# Altium PCB ATMEGA128转换座_方形.PCBDOC
Units mm, origin at the board's own origin, x right, y up, seen from the top; angles counter-clockwise.
Board outline 152.4 x 101.6 mm, 2 copper layers (Top Layer, Bottom Layer); 5 components, 61 nets, 128 pads, 0 vias.
Unrouted connection lines stored in the file: 3.
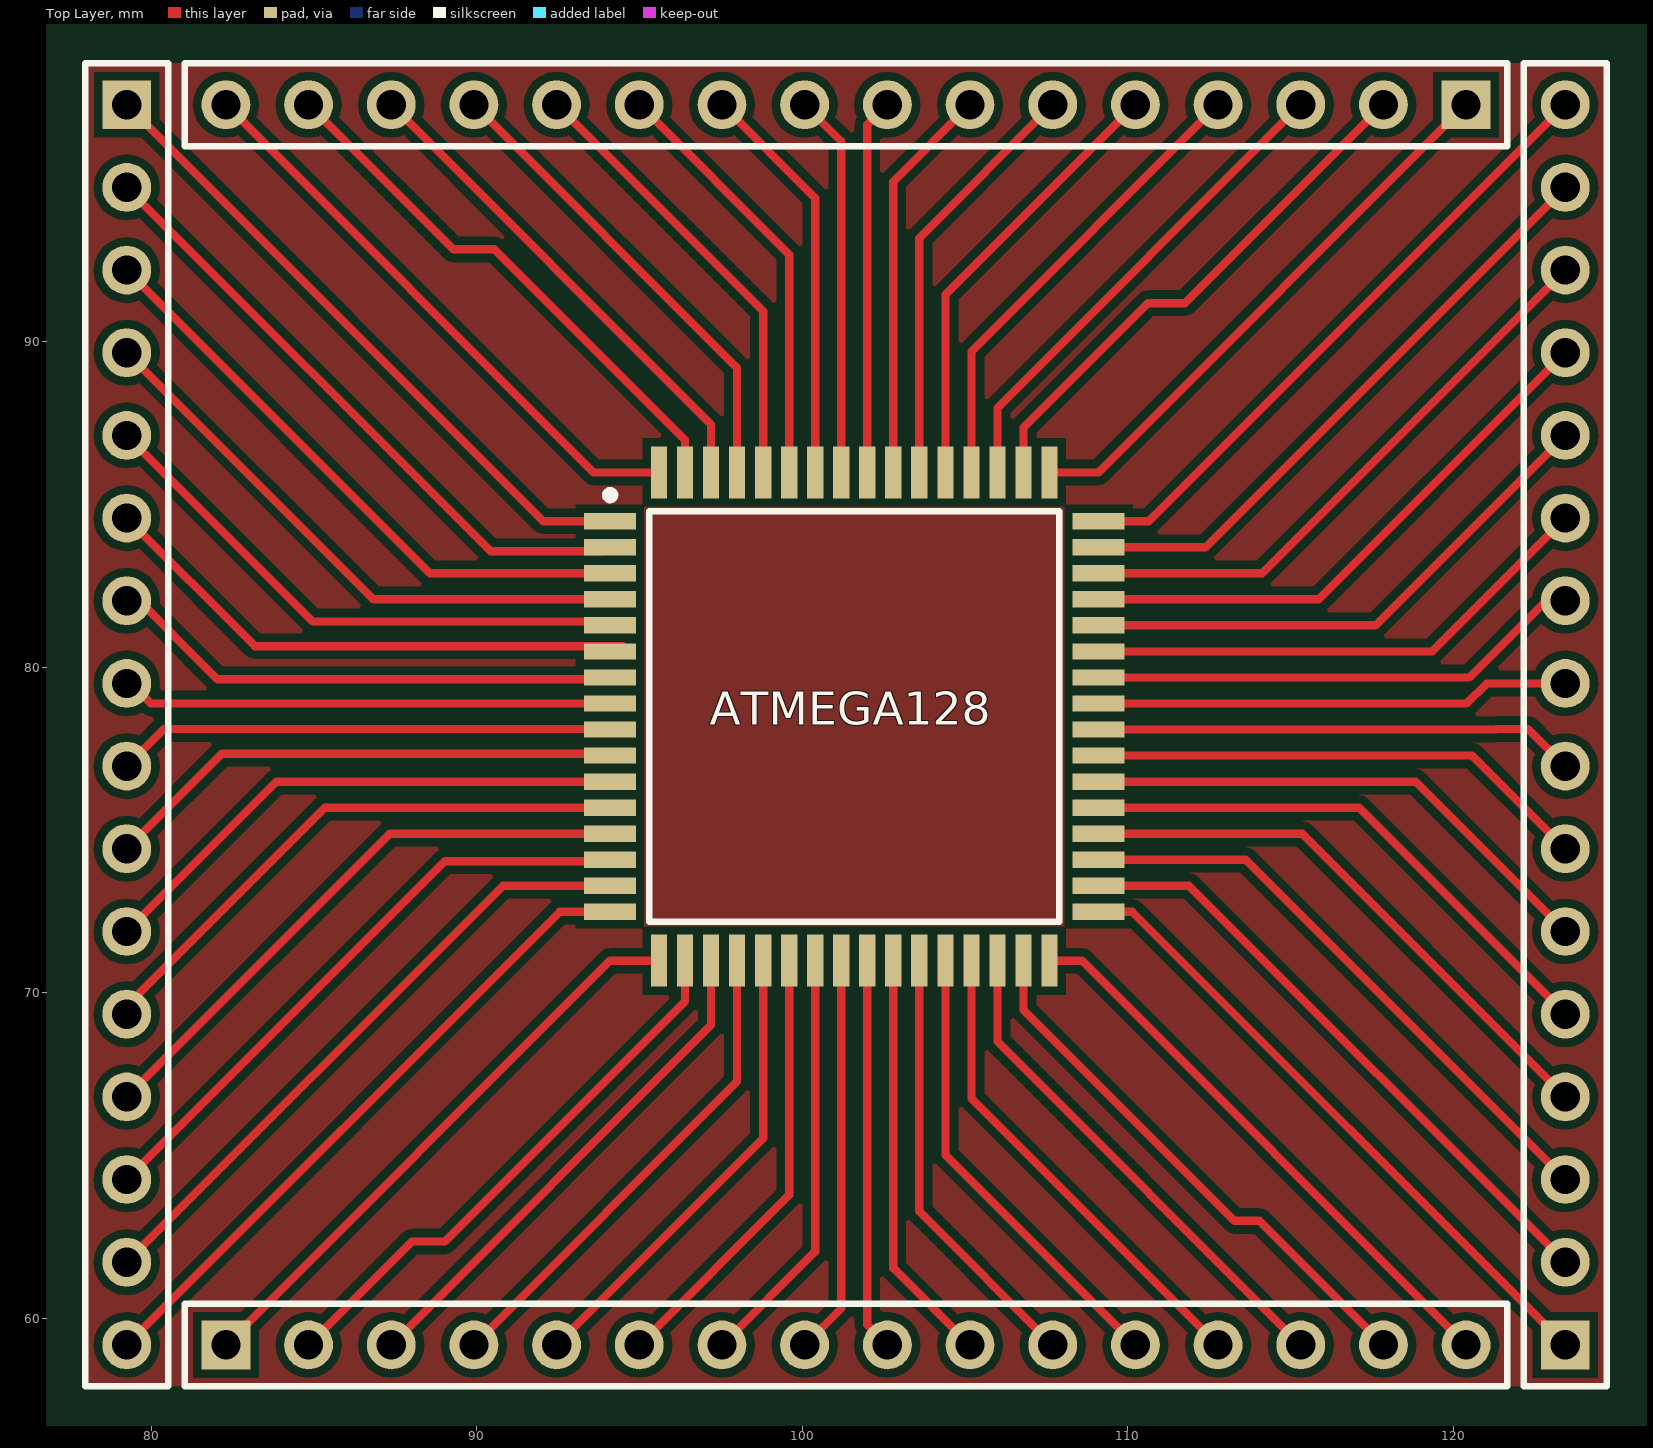
[diagram p0: Top Layer view]
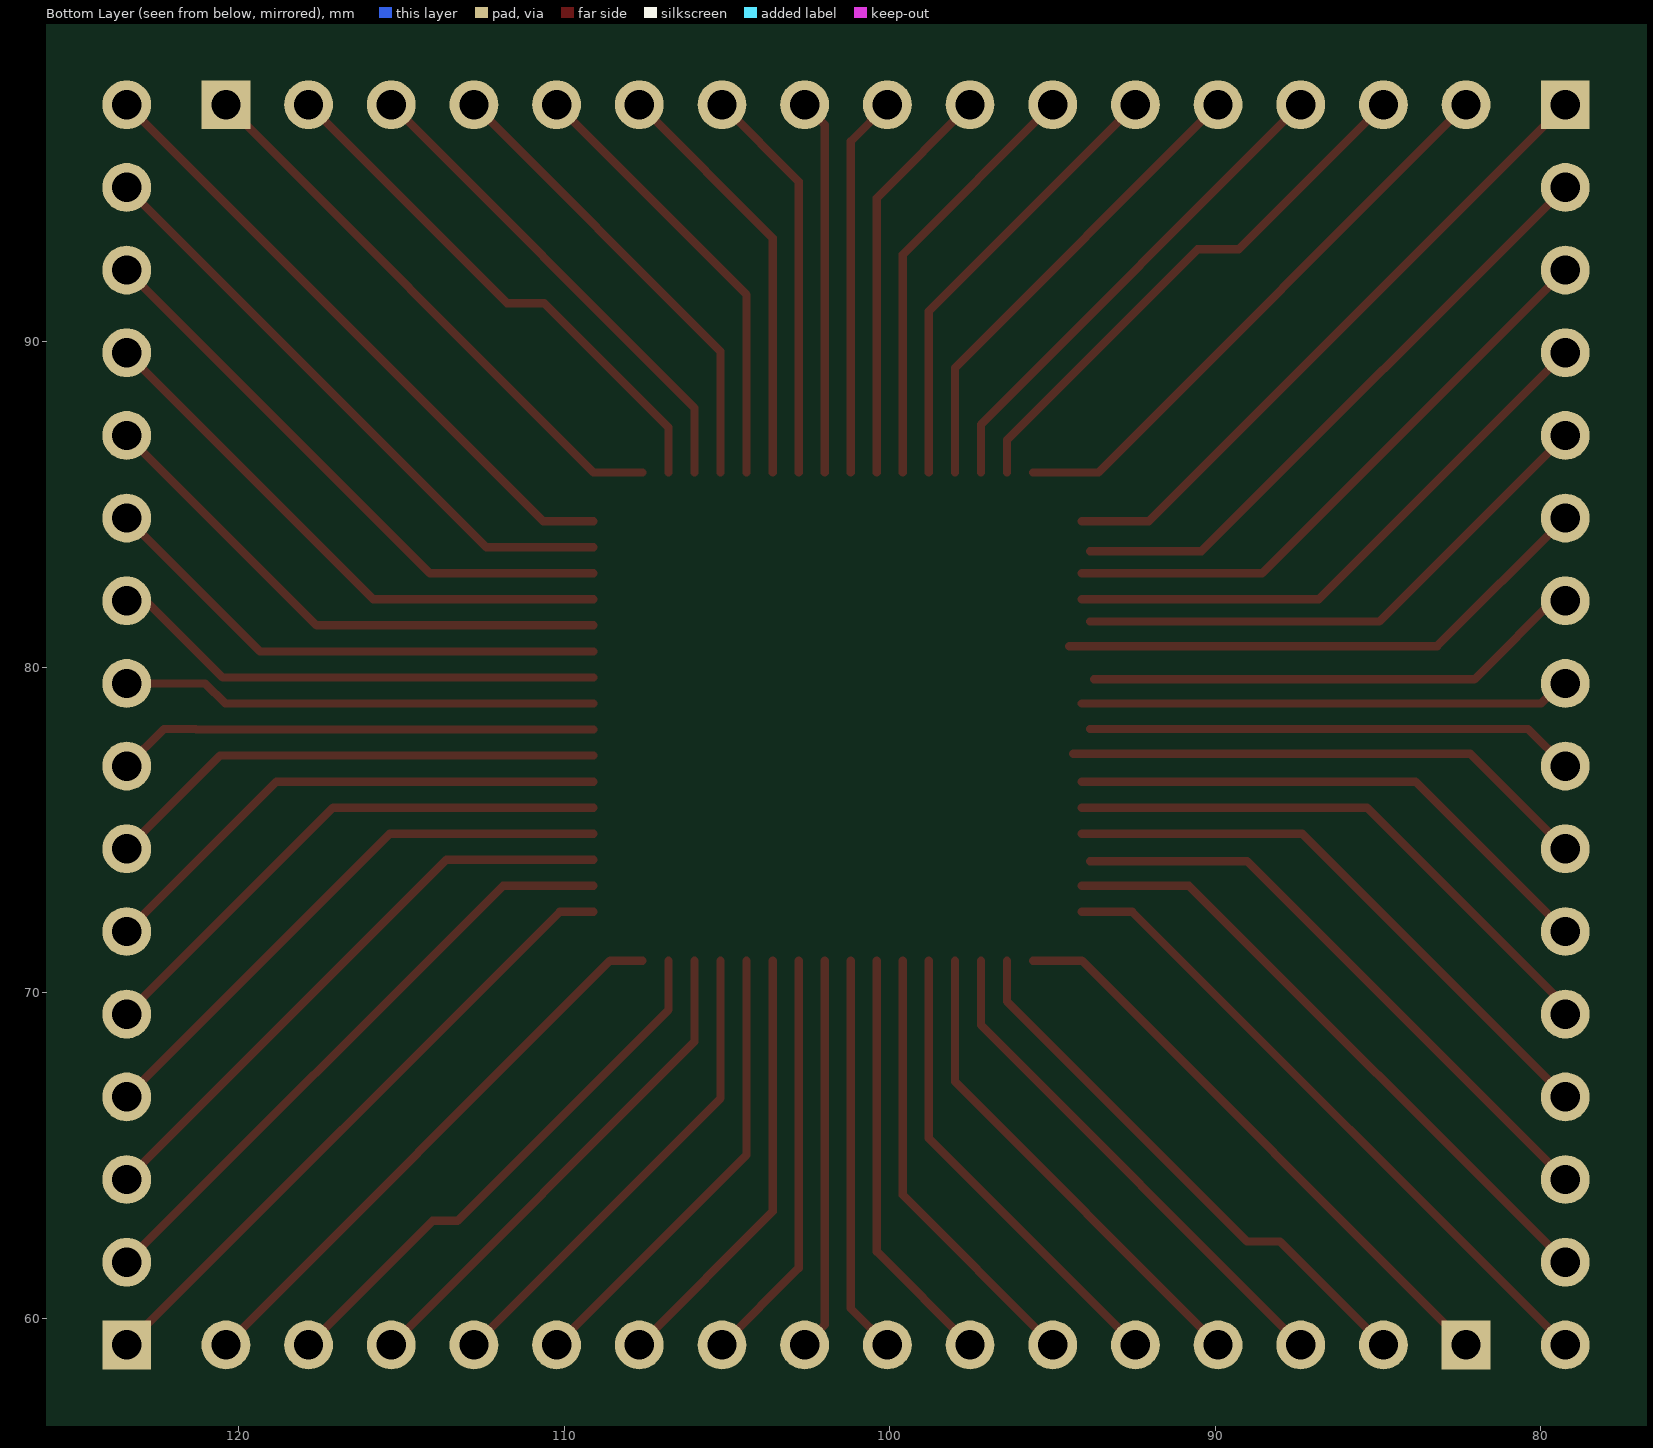
[diagram p1: Bottom Layer view, seen from below]

## Layer stack, top to bottom
Top Layer: signal copper 0.0356
Dielectric: dielectric 0.32, FR-4, Dk 4.8
Bottom Layer: signal copper 0.0356

## Board outline
25.4,25.4 177.8,25.4 177.8,127 25.4,127

## Design rules (kind name [scope] priority, off if disabled: settings)
Clearance [All] p1: gap=0.254
ComponentClearance [All] p1: gap=0.254 collisioncheckmode=3 verticalgap=0.254
PolygonConnect [All] p1: connectstyle=Relief reliefconductorwidth=0.254 reliefentries=4 polygonreliefangle="90 Angle"
RoutingVias [All] p1: holewidth=0.711 width=1.27 viastyle="Through Hole" minholewidth=0.711 minwidth=1.27 maxholewidth=0.711 maxwidth=1.27
SolderMaskExpansion [All] p1: expansion=0.102
TestPointUsage [All] p1: valid=0 allowmultiple=FALSE
Testpoint [All] p1: side=15 testpointundercomponent=TRUE minsize=1.016 maxsize=2.54 preferedsize=1.524 minholesize=0 maxholesize=1.016 preferedholesize=0.813 testpointgrid=0.025 style=1023 order=0123456789
Width [All] p1: maxlimit=0.254 minlimit=0.254 preferedwidth=0.254
17 further rules are at their usual default settings.

## Classes and differential pairs
component class ATMEGA128转换座: ATMEGA128 ""

## Components (designator, comment, footprint, x,y, rotation, side; value= is the part's Value field where it differs from the comment)
ATMEGA128 "ATmega128-16AI" 64A 101.6,78.486 r0 top (schematic designator U1)
P1 "Header 16" HDR1X16 79.248,97.282 r270 top
P2 "Header 16" HDR1X16 82.296,59.182 r0 top
P3 "Header 16" HDR1X16 123.444,59.182 r90 top
P4 "Header 16" HDR1X16 120.396,97.282 r180 top

## Footprints (in the part's own frame and the unit in brackets; to place one, negate y for a bottom-side part, rotate by r counter-clockwise, add the part's x,y. Pads: shape width x height; smd on the part's side, far side on the other; paste and mask are expansions set on the pad)
64A [mm] "QFP; 64 Leads; Body 14 x 14 mm; Pitch 0.8 mm"
  rect 1.6x0.5 smd: 1(-7.5,6) 2(-7.5,5.2) 3(-7.5,4.4) 4(-7.5,3.6) 5(-7.5,2.8) 6(-7.5,2) 7(-7.5,1.2) 8(-7.5,0.4) 9(-7.5,-0.4) 10(-7.5,-1.2) 11(-7.5,-2) 12(-7.5,-2.8) 13(-7.5,-3.6) 14(-7.5,-4.4) 15(-7.5,-5.2) 16(-7.5,-6) 33(7.5,-6) 34(7.5,-5.2) 35(7.5,-4.4) 36(7.5,-3.6) 37(7.5,-2.8) 38(7.5,-2) 39(7.5,-1.2) 40(7.5,-0.4) 41(7.5,0.4) 42(7.5,1.2) 43(7.5,2) 44(7.5,2.8) 45(7.5,3.6) 46(7.5,4.4) 47(7.5,5.2) 48(7.5,6)
  rect 0.5x1.6 smd: 17(-6,-7.5) 18(-5.2,-7.5) 19(-4.4,-7.5) 20(-3.6,-7.5) 21(-2.8,-7.5) 22(-2,-7.5) 23(-1.2,-7.5) 24(-0.4,-7.5) 25(0.4,-7.5) 26(1.2,-7.5) 27(2,-7.5) 28(2.8,-7.5) 29(3.6,-7.5) 30(4.4,-7.5) 31(5.2,-7.5) 32(6,-7.5) 49(6,7.5) 50(5.2,7.5) 51(4.4,7.5) 52(3.6,7.5) 53(2.8,7.5) 54(2,7.5) 55(1.2,7.5) 56(0.4,7.5) 57(-0.4,7.5) 58(-1.2,7.5) 59(-2,7.5) 60(-2.8,7.5) 61(-3.6,7.5) 62(-4.4,7.5) 63(-5.2,7.5) 64(-6,7.5)
  silkscreen extent -7.62,-6.3 6.3,6.92
HDR1X16 [mm] "Connector; Header; 16 Position"
  rect 1.5x1.5 hole 0.9: 1(0,0)
  round 1.5 hole 0.9: 2(2.54,0) 3(5.08,0) 4(7.62,0) 5(10.16,0) 6(12.7,0) 7(15.24,0) 8(17.78,0) 9(20.32,0) 10(22.86,0) 11(25.4,0) 12(27.94,0) 13(30.48,0) 14(33.02,0) 15(35.56,0) 16(38.1,0)
  silkscreen extent -1.27,-1.27 39.37,1.27

## Part data
ATMEGA128: "8-Bit AVR Microcontroller with 128K Bytes of In-System Programmable Flash Memory"
P1 P2 P3 P4: "Header, 16-Pin"

## Nets (pads, with @x,y where several pads share a name; then routed paths per layer and width w, separated by ;. In a path a pad name is that pad's centre, name@x,y a point inside that pad or via, vN(x,y) a via of type N, cw(c..) or ccw(c..) an arc to the next point about the centre after c; other vN are vias at no path point)
AREF: ATMEGA128.62 P4.14 | length 15.4
  Top Layer w0.254: P4.14 97.2,87.458 ATMEGA128.62
AVCC: ATMEGA128.64 P4.16 | length 18
  Top Layer w0.254: P4.16 93.592,85.986 ATMEGA128.64
GND: ATMEGA128.22 ATMEGA128.53 ATMEGA128.63 P2.6 P4.5 P4.15 | length 44.3
  Top Layer w0.254: P4.15 89.281,92.837 90.551,92.837 96.4,86.988 ATMEGA128.63 ; P2.6 99.6,63.786 ATMEGA128.22 ; ATMEGA128.53 104.4,91.446 P4.5
PA0: ATMEGA128.51 P4.3 | length 15.2
  Top Layer w0.254: ATMEGA128.51 106,87.966 P4.3
PA1: ATMEGA128.50 P4.2 | length 16.5
  Top Layer w0.254: ATMEGA128.50 106.8,87.369 110.617,91.186 111.76,91.186 P4.2
PA2: ATMEGA128.49 P4.1 | length 17.5
  Top Layer w0.254: ATMEGA128.49 109.1,85.986 P4.1
PA3: ATMEGA128.48 P3.16 | length 19.6
  Top Layer w0.254: ATMEGA128.48 110.648,84.486 P3.16
PA4: ATMEGA128.47 P3.15 | length 18.9
  Top Layer w0.254: ATMEGA128.47 112.388,83.686 P3.15
PA5: ATMEGA128.46 P3.14 | length 18.2
  Top Layer w0.254: ATMEGA128.46 114.128,82.886 P3.14
PA6: ATMEGA128.45 P3.13 | length 17.5
  Top Layer w0.254: ATMEGA128.45 115.868,82.086 P3.13
PA7: ATMEGA128.44 P3.12 | length 16.8
  Top Layer w0.254: ATMEGA128.44 117.608,81.286 P3.12
PB0: ATMEGA128.10 P1.10 | length 16.3
  Top Layer w0.254: P1.10 82.169,77.343 ATMEGA128.10@94.361,77.343
PB1: ATMEGA128.11 P1.11 | length 16.8
  Top Layer w0.254: P1.11 83.852,76.486 ATMEGA128.11
PB2: ATMEGA128.12 P1.12 | length 17.6
  Top Layer w0.254: P1.12 79.248,69.596 85.338,75.686 ATMEGA128.12
PB3: ATMEGA128.13 P1.13 | length 18.2
  Top Layer w0.254: P1.13 87.332,74.886 ATMEGA128.13
PB4: ATMEGA128.14 P1.14 | length 18.7
  Top Layer w0.254: P1.14 89.027,74.041 ATMEGA128.14@93.853,74.041
PB5: ATMEGA128.15 P1.15 | length 19.6
  Top Layer w0.254: P1.15 90.812,73.286 ATMEGA128.15
PB6: ATMEGA128.16 P1.16 | length 20.4
  Top Layer w0.254: P1.16 92.552,72.486 ATMEGA128.16
PB7: ATMEGA128.17 P2.1 | length 18.2
  Top Layer w0.254: P2.1 94.1,70.986 ATMEGA128.17
PC0: ATMEGA128.35 P3.3 | length 18.4
  Top Layer w0.254: ATMEGA128.35 113.62,74.086 P3.3
PC1: ATMEGA128.36 P3.4 | length 17.3
  Top Layer w0.254: ATMEGA128.36 115.36,74.886 P3.4@123.19,67.056
PC2: ATMEGA128.37 P3.5 | length 17
  Top Layer w0.254: ATMEGA128.37 117.1,75.686 P3.5
PC3: ATMEGA128.38 P3.6 | length 16.3
  Top Layer w0.254: ATMEGA128.38 118.84,76.486 P3.6
PC4: ATMEGA128.39 P3.7 | length 15.5
  Top Layer w0.254: ATMEGA128.39 120.58,77.286 P3.7
PC5: ATMEGA128.40 P3.8 | length 14.8
  Top Layer w0.254: ATMEGA128.40 121.304,78.086 121.323,78.105 122.301,78.105 P3.8
PC6: ATMEGA128.41 P3.9 | length 14.6
  Top Layer w0.254: ATMEGA128.41 120.415,78.886 121.031,79.502 P3.9
PC7: ATMEGA128.42 P3.10 | length 14.7
  Top Layer w0.254: ATMEGA128.42 120.497,79.686 P3.10@122.853,82.042
PD0: ATMEGA128.25 P2.9 | length 12.1
  Top Layer w0.254: ATMEGA128.25 102,59.798 P2.9
PD1: ATMEGA128.26 P2.10 | length 12.8
  Top Layer w0.254: ATMEGA128.26 102.8,61.538 P2.10
PD2: ATMEGA128.27 P2.11 | length 13.5
  Top Layer w0.254: ATMEGA128.27 103.6,63.278 P2.11
PD3: ATMEGA128.28 P2.12 | length 14.2
  Top Layer w0.254: ATMEGA128.28 104.4,65.018 P2.12
PD4: ATMEGA128.29 P2.13 | length 14.9
  Top Layer w0.254: ATMEGA128.29 105.2,66.758 P2.13
PD5: ATMEGA128.30 P2.14 | length 15.7
  Top Layer w0.254: ATMEGA128.30 106,68.498 P2.14
PD6: ATMEGA128.31 P2.15 | length 16.8
  Top Layer w0.254: ATMEGA128.31 106.8,69.476 113.284,62.992 114.046,62.992 P2.15
PD7: ATMEGA128.32 P2.16 | length 17.7
  Top Layer w0.254: ATMEGA128.32 108.592,70.986 P2.16
PE0: ATMEGA128.2 P1.2 | length 19.2
  Top Layer w0.254: P1.2 90.424,83.566 ATMEGA128.2@93.853,83.566
PE1: ATMEGA128.3 P1.3 | length 18.7
  Top Layer w0.254: P1.3 88.564,82.886 ATMEGA128.3
PE2: ATMEGA128.4 P1.4 | length 18
  Top Layer w0.254: P1.4 86.824,82.086 ATMEGA128.4
PE3: ATMEGA128.5 P1.5 | length 17
  Top Layer w0.254: P1.5 84.963,81.407 ATMEGA128.5@93.853,81.407
PE4: ATMEGA128.6 P1.6 | length 16.9
  Top Layer w0.254: P1.6 83.185,80.645 ATMEGA128.6@94.488,80.645
PE5: ATMEGA128.7 P1.7 | length 15.5
  Top Layer w0.254: P1.7@79.375,82.296 82.042,79.629 ATMEGA128.7@93.726,79.629
PE6: ATMEGA128.8 P1.8 | length 15.3
  Top Layer w0.254: P1.8@79.121,79.756 79.991,78.886 ATMEGA128.8
PE7: ATMEGA128.9 P1.9 | length 15.1
  Top Layer w0.254: P1.9 80.391,78.105 ATMEGA128.9@93.853,78.105
PEN: ATMEGA128.1 P1.1 | length 20.2
  Top Layer w0.254: P1.1 92.044,84.486 ATMEGA128.1
PF0: ATMEGA128.61 P4.13 | length 14.6
  Top Layer w0.254: P4.13 98,89.198 ATMEGA128.61
PF1: ATMEGA128.60 P4.12 | length 13.9
  Top Layer w0.254: P4.12 98.8,90.938 ATMEGA128.60
PF2: ATMEGA128.59 P4.11 | length 13.2
  Top Layer w0.254: P4.11 99.6,92.678 ATMEGA128.59
PF3: ATMEGA128.58 P4.10 | length 12.5
  Top Layer w0.254: P4.10 100.4,94.418 ATMEGA128.58
PF4: ATMEGA128.57 P4.9 | length 11.8
  Top Layer w0.254: P4.9 101.2,96.158 ATMEGA128.57
PF5: ATMEGA128.56 P4.8 | length 11.6
  Top Layer w0.254: ATMEGA128.56 102,96.666 P4.8
PF6: ATMEGA128.55 P4.7 | length 12.3
  Top Layer w0.254: ATMEGA128.55 102.8,94.926 P4.7
PF7: ATMEGA128.54 P4.6 | length 13
  Top Layer w0.254: ATMEGA128.54 103.6,93.186 P4.6
PG0: ATMEGA128.33 P3.1 | length 19.9
  Top Layer w0.254: ATMEGA128.33 110.14,72.486 P3.1
PG1: ATMEGA128.34 P3.2 | length 19.1
  Top Layer w0.254: ATMEGA128.34 111.88,73.286 P3.2
PG2: ATMEGA128.43 P3.11 | length 16
  Top Layer w0.254: ATMEGA128.43 119.348,80.486 P3.11
PG3: ATMEGA128.18 P2.2 | length 17.2
  Top Layer w0.254: P2.2 88.011,62.357 89.027,62.357 96.4,69.73 ATMEGA128.18
PG4: ATMEGA128.19 P2.3 | length 15.9
  Top Layer w0.254: P2.3 97.2,69.006 ATMEGA128.19
RESET: ATMEGA128.20 P2.4 | length 15.2
  Top Layer w0.254: P2.4 98,67.266 ATMEGA128.20
VCC: ATMEGA128.21 ATMEGA128.52 P2.5 P4.4 | length 28.9
  Top Layer w0.254: P2.5 98.8,65.526 ATMEGA128.21 ; ATMEGA128.52 105.2,89.706 P4.4
XTAL1: ATMEGA128.24 P2.8 | length 12.3
  Top Layer w0.254: P2.8 101.2,60.306 ATMEGA128.24
XTAL2: ATMEGA128.23 P2.7 | length 13
  Top Layer w0.254: P2.7 100.4,62.046 ATMEGA128.23

## Polygon pours and split planes (outlines as drawn)
no net on Top Layer (solid): 77.978,98.552 124.714,98.552 124.714,57.912 77.978,57.912

## Silkscreen, mask and mechanical layers (free items; w line width, h text height)
Mechanical 1:
  lines w0.254: 77.47,57.404 77.47,99.06 125.095,99.06 125.222,98.806 125.222,57.404 77.47,57.404